# Altium PCB GY-G11.PCBDOC (part 6 of 7)
Units mm, origin at the board's own origin, x right, y up, seen from the top; angles counter-clockwise.
Board outline 170.4 x 114.15 mm, 2 copper layers (Top Layer, Bottom Layer); 364 components, 260 nets, 1285 pads, 753 vias.
Unrouted connection lines stored in the file: 2.
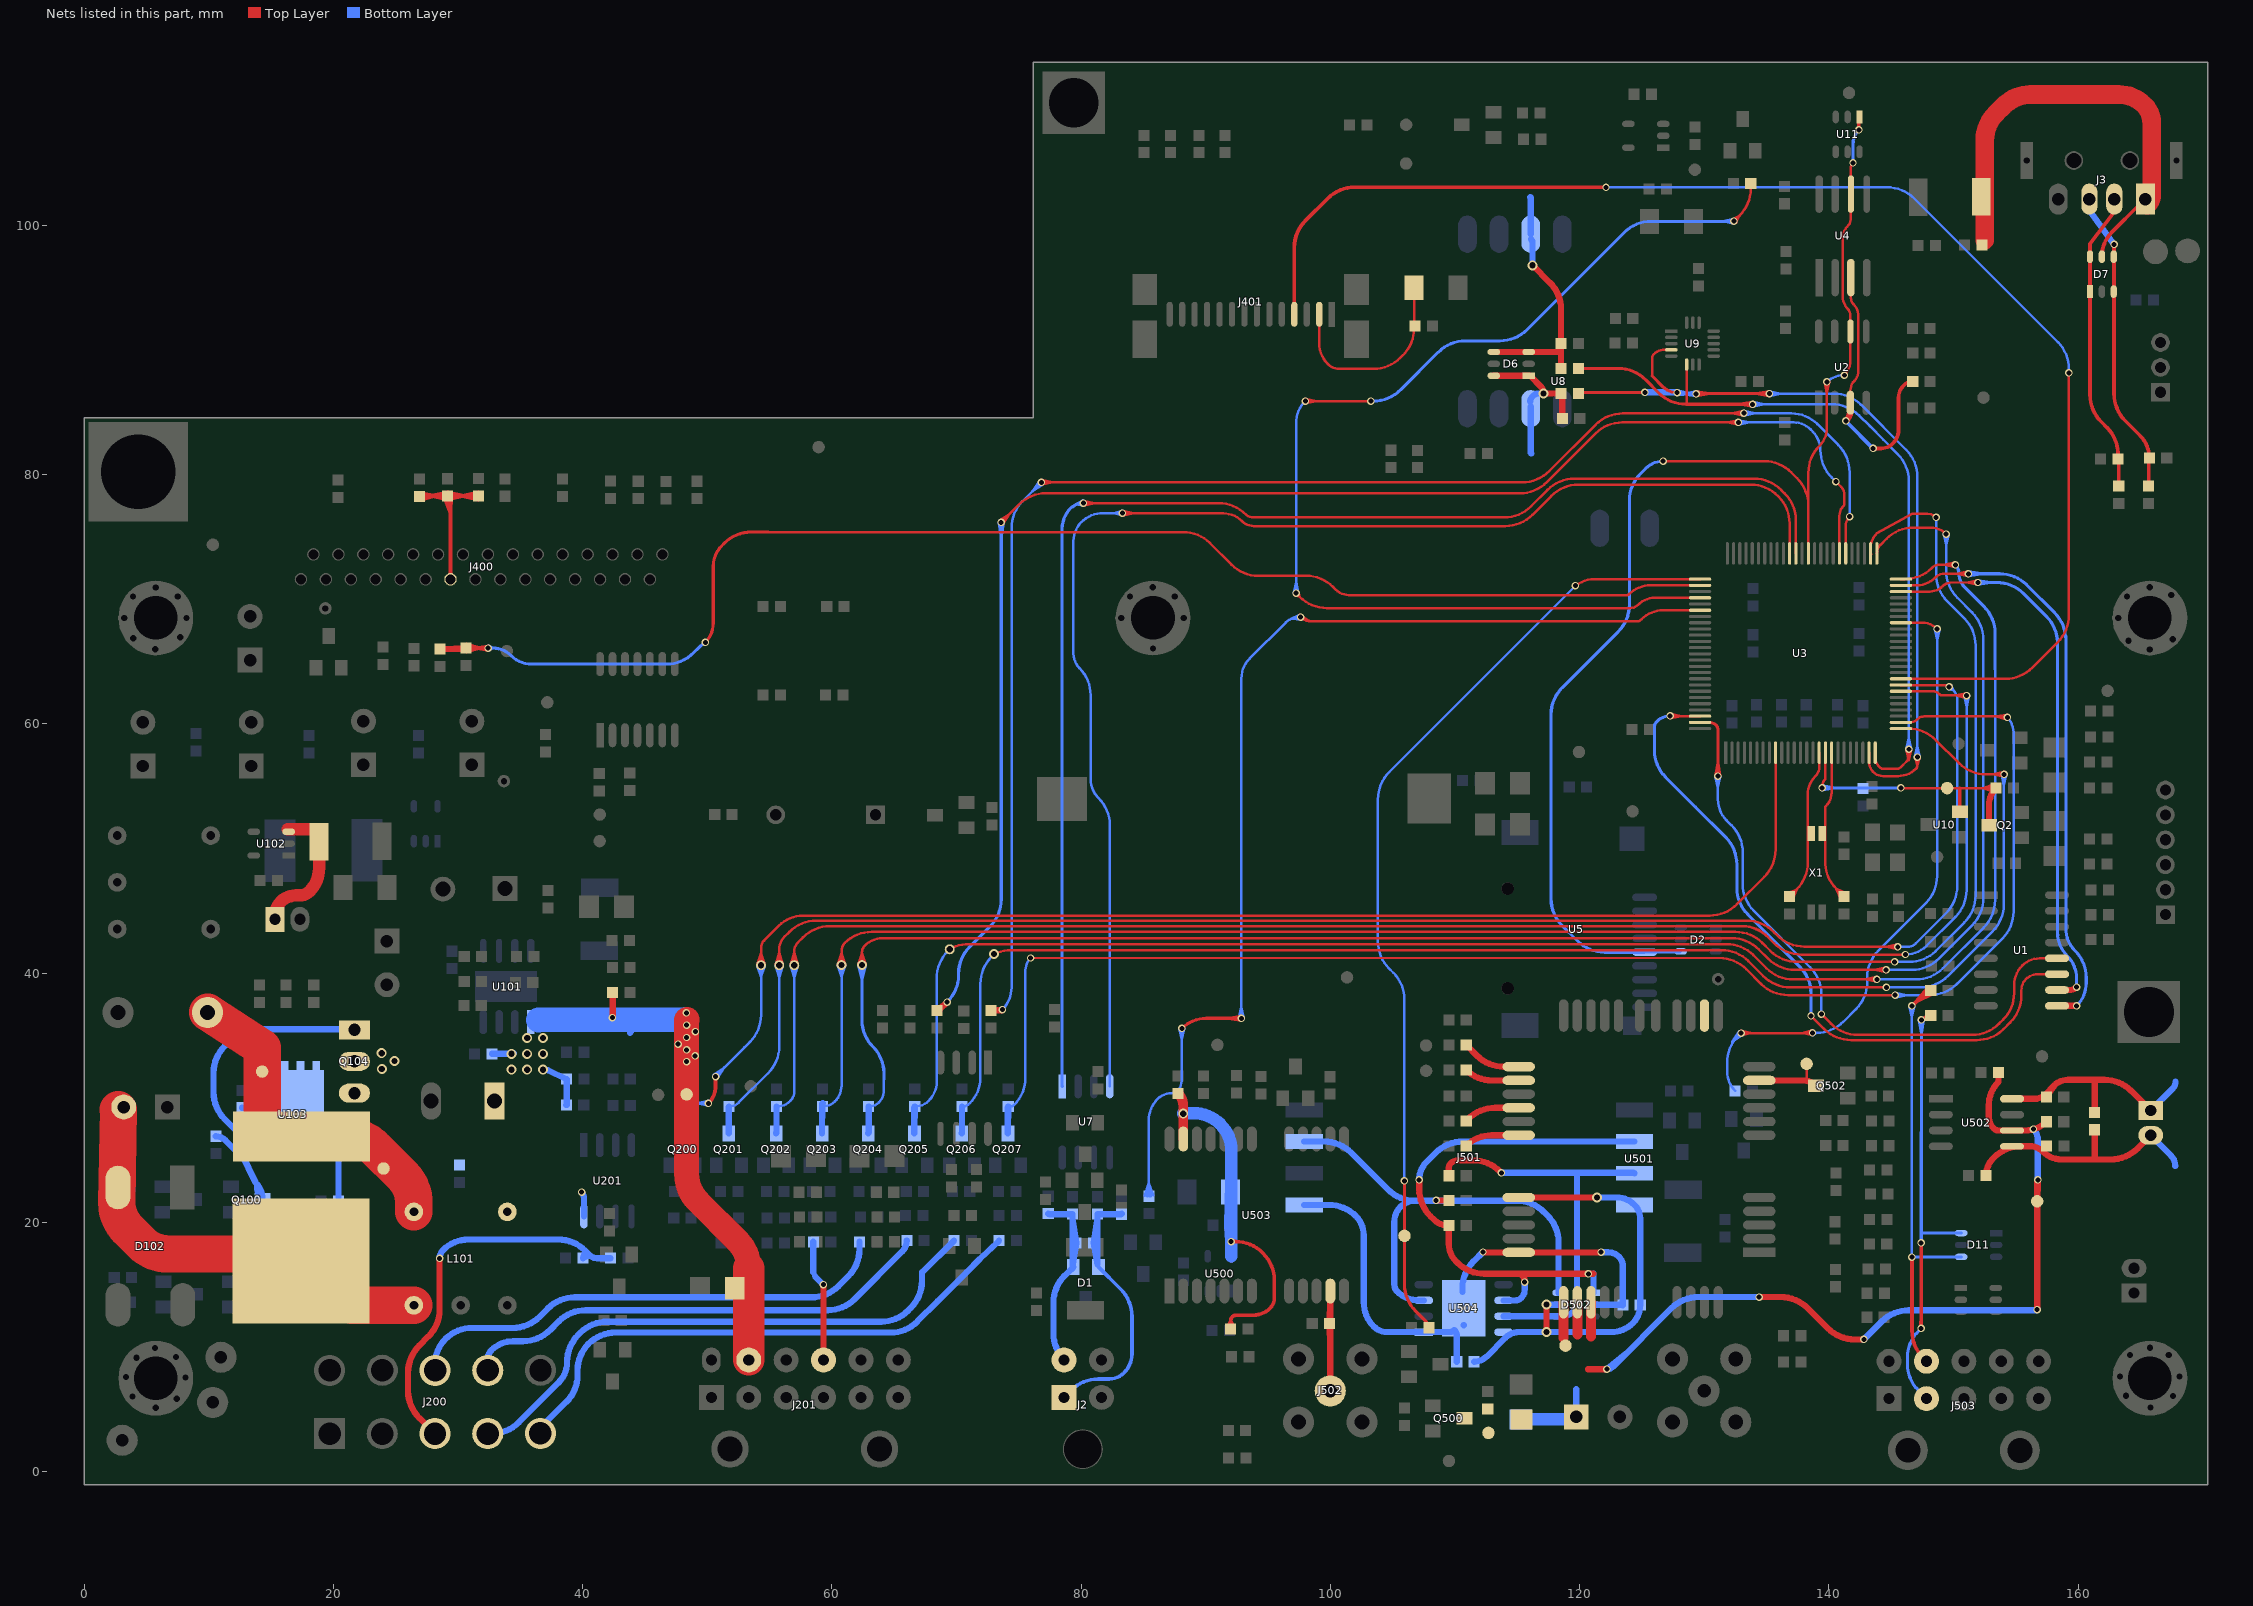
[diagram p6: the nets of this part, all layers, seen from the top]

## Via types
v1: diameter 0.6, hole 0.4, Top Layer to Bottom Layer, 620 vias
v2: diameter 0.8, hole 0.5, Top Layer to Bottom Layer, 121 vias
v3: diameter 1, hole 0.5, Top Layer to Bottom Layer, 10 vias
v4: diameter 1.27, hole 0.711, Top Layer to Bottom Layer, 2 vias

## Nets (pads, with @x,y where several pads share a name; then routed paths per layer and width w, separated by ;. In a path a pad name is that pad's centre, name@x,y a point inside that pad or via, vN(x,y) a via of type N, cw(c..) or ccw(c..) an arc to the next point about the centre after c; other vN are vias at no path point) (continued)
PWREN: Q100.3 R103.1 R110.2 R111.2 R117.2 | length 16.2
  Bottom Layer w0.5: R117.2@10.564,26.919 cw(c10.564,25.863) 11.31,26.61 12.213,25.707 ccw(c12.625,26.12) R110.2@12.625,25.537 ; R110.2@12.472,25.473 cw(c12.625,25.32) R110.2@12.625,25.537 ; 13.865,22.906 ccw(c15.377,22.906) Q100.3@14.308,21.838 ; R103.1@18.995,17.506 18.515,17.985 ccw(c16.347,15.817) 16.347,18.883 R111.2@14.253,18.883 ccw(c14.119,19.017) 14.308,19.017 Q100.3@14.308,21.838 ; R110.2@12.625,25.537 13.74,23.209 cw(c12.369,21.838) Q100.3@14.308,21.838
PWREN1: Q104.1 R110.1 U103.4 | length 21.4
  Bottom Layer w0.5: U103.4@14.817,26.631 13.356,26.631 cw(c13.356,27.665) 13.146,26.652 cw(c13.356,27.665) R110.1@12.625,26.934 11.278,28.281 cw(c13.446,30.449) 10.38,30.449 10.38,31.99 cw(c13.446,31.99) 11.278,34.158 11.722,34.602 cw(c13.89,32.434) 13.89,35.5 21.592,35.5 cw(c21.592,35.363) Q104.1@21.689,35.46
PWREXT: R524.2 U3.43 | length 60.9
  Top Layer w0.2: v1(132.95,35.2) 138.656,35.2 ccw(c138.656,35.234) v1(138.68,35.21) 137.78,35.2 ; v1@132.972,35.001 133.85,35.2 v1@132.972,35.399 ; v1@138.656,35.409 137.78,35.2 ; v1@138.66,35.011 137.78,35.2 ; U3.43@145.776,68.124 147.464,68.124 cw(c147.464,66.404) v1(148.68,67.62)
  Bottom Layer w0.2: R524.2@132.477,30.564 cw(c134.062,32.149) 131.82,32.149 131.82,32.8 cw(c134.886,32.8) 132.718,34.968 v1(132.95,35.2) 132.226,34.476 ; v1@132.795,35.327 132.226,34.476 ; v1@133.077,35.045 132.226,34.476 ; v1(138.68,35.21) 138.99,35.21 ; v1@138.745,35.021 138.99,35.21 ; v1@138.745,35.399 138.99,35.21 ; v1@148.481,67.598 148.68,66.72 v1@148.879,67.598 ; v1(148.68,67.62) 148.68,47.8 cw(c145.614,47.8) 147.782,45.632 143.968,41.818 ccw(c146.136,39.65) 143.07,39.65 143.07,39.29 cw(c140.004,39.29) 142.172,37.122 141.158,36.108 cw(c138.99,38.276) 138.99,35.21
PWRGPS: R512.2 U3.81 | length 101.1
  Top Layer w0.2: v1(88.07,35.57) v1@88.102,35.602 ; v1@97.55,68.78 98.28,68.27 ; v1(97.61,68.57) ccw(c98.431,69.391) 98.431,68.23 124.545,68.23 ccw(c124.545,68.845) 124.98,68.41 cw(c126.703,66.687) 126.703,69.124 U3.81@129.656,69.124
  Top Layer w0.254: v1(88.07,35.57) cw(c90.026,33.614) 90.026,36.38 v1(92.85,36.38) v1@92.828,36.358 ; v1@92.836,36.208 91.788,36.38 v1@92.836,36.552
  Bottom Layer w0.2: R512.2@85.113,22.149 85.42,23.149 ; R512.2@85.31,22.108 85.42,23.149 ; R512.2@85.598,22.118 85.42,23.149 ; R512.2@85.792,22.171 85.42,23.149 ; v1@87.871,35.55 88.06,34.67 ; v1@88.269,35.546 88.06,34.67 ; v1@92.651,36.402 92.85,37.28 v1@93.049,36.402 ; v1(92.85,36.38) 92.85,63.65 cw(c95.095,63.65) 93.508,65.238 96.42,68.15 cw(c97.434,67.136) 97.434,68.57 v1(97.61,68.57) ; v1@97.55,68.78 96.86,68.45 v1@97.638,68.371 ; 85.42,23.149 R512.2@85.454,22.103 cw(c85.536,22.185) 85.42,22.185 85.42,28.196 cw(c87.844,28.196) 86.13,29.91 cw(c87.265,28.775) 87.265,30.38 ccw(c87.265,31.045) 87.735,30.575 ccw(c86.949,31.36) 88.06,31.36 88.06,35.546 cw(c88.094,35.546) v1(88.07,35.57) 88.06,34.67
PWRKEY: pad.8@138.21,32.73 Q502.3 U501.10 | length 6
  Top Layer w0.2: 138.21,31.37 pad.8@138.21,32.73
  Top Layer w0.5: U501.10@134.41,31.398 137.948,31.398 cw(c137.948,30) 138.21,31.373 cw(c137.948,30) Q502.3@138.936,30.988
PWRLCM: R405.2 U3.79 | length 100.3
  Top Layer w0.2: v1@97.136,70.329 97.542,70.198 ; v1(97.24,70.5) 97.542,70.198 ; v1@97.411,70.604 97.542,70.198 ; v1(97.98,85.91) v1(103.251,85.91) ; v1@98.002,85.711 98.88,85.91 v1@98.002,86.109 ; U3.79@129.656,70.124 126.041,70.124 ccw(c126.041,68.199) 124.68,69.56 cw(c124.052,70.188) 124.052,69.3 99.71,69.3 cw(c99.71,72.366) 97.542,70.198 ; v1@132.263,100.502 132.825,100.785 ; v1(132.38,100.34) 132.825,100.785 ; v1@132.542,100.223 132.825,100.785 ; R405.2@133.723,103.358 133.723,102.953 cw(c130.657,102.953) 132.825,100.785
  Bottom Layer w0.2: v1@97.041,70.522 97.24,71.4 v1@97.439,70.522 ; v1(97.24,70.5) 97.24,84.123 cw(c99.767,84.123) v1(97.98,85.91) ; v1@132.356,100.539 131.48,100.33 ; v1@132.356,100.33 ccw(c132.356,100.364) v1(132.38,100.34) 131.48,100.33 ; v1@132.36,100.141 131.48,100.33
  Bottom Layer w0.254: v1(103.251,85.91) 103.46,85.91 ccw(c103.46,88.976) 105.628,86.808 108.663,89.842 cw(c110.831,87.674) 110.831,90.74 113.601,90.74 ccw(c113.601,93.806) 115.769,91.638 123.562,99.432 cw(c125.73,97.264) 125.73,100.33 v1@132.356,100.33
PWRMOBILE: pad.7@105.94,18.93 R511.2 U3.76 | length 77.6
  Top Layer w0.2: v1@119.51,70.93 cw(c121.185,69.255) 121.185,71.624 U3.76@129.656,71.624
  Top Layer w0.254: v1(105.94,23.34) 105.94,15.05 ccw(c109.006,15.05) 106.838,12.882 107.717,12.003 cw(c107.268,11.554) R511.2@107.903,11.554
  Bottom Layer w0.2: v1(105.94,23.34) 105.94,37.87 ccw(c102.874,37.87) 105.042,40.038 104.708,40.372 cw(c106.876,42.54) 103.81,42.54 103.81,53.96 cw(c106.876,53.96) 104.708,56.128 119.51,70.93 cw(c119.534,70.93) 119.517,70.947 v1(119.66,71.09)
PWRPRINT: R401.2 R406.2 U3.77 | length 119.3
  Top Layer w0.2: 54.86,75.42 ccw(c54.908,75.468) 54.908,75.4 88.17,75.4 cw(c88.17,72.334) 90.338,74.502 92.052,72.788 ccw(c94.22,74.956) 94.22,71.89 98.04,71.89 cw(c98.04,68.824) 100.201,70.999 cw(c98.04,68.824) 100.208,70.992 100.42,70.78 ccw(c101.482,71.842) 101.482,70.34 123.791,70.34 ccw(c123.791,70.579) 123.96,70.41 cw(c125.683,68.687) 125.683,71.124 U3.77@129.656,71.124
  Top Layer w0.254: R406.2@30.646,66.103 v1@32.379,66.103 ; R406.2@30.688,65.788 31.852,66.103 R406.2@30.688,66.418 ; v1@32.394,65.918 31.348,66.103 ; v1@32.398,66.263 31.348,66.103 ; v1(32.41,66.09) 31.348,66.103 ; v1(49.84,66.54) ccw(c48.295,68.085) 50.48,68.085 50.48,72.687 cw(c52.733,72.687) 51.14,74.28 51.362,74.502 cw(c53.53,72.334) 53.53,75.4 54.908,75.4
  Top Layer w0.5: R401.2@28.542,66.023 30.453,66.023 ccw(c30.453,66.296) R406.2@30.646,66.103 R401.2@28.694,66.023
  Bottom Layer w0.254: v1(32.41,66.09) 32.787,66.09 ; v1@32.45,65.922 32.787,66.09 ; v1@32.45,66.258 32.787,66.09 ; v1@49.841,66.538 ccw(c51.28,64.164) 49.317,66.127 48.888,65.698 cw(c46.72,67.866) 46.72,64.8 35.902,64.8 cw(c35.902,67.122) 34.26,65.48 ccw(c32.787,64.007) 32.787,66.09
RD1: R235.2 U3.57 | length 131.6
  Top Layer w0.2: v1@73.443,76.325 74.294,76.894 v1@73.725,76.043 ; v1(73.57,76.17) 75.012,77.612 cw(c77.18,75.444) 77.18,78.51 115.2,78.51 ccw(c115.2,81.576) 117.368,79.408 121.262,83.302 cw(c123.43,81.134) 123.43,84.2 v1@132.74,84.2 ; v1@132.716,83.991 131.84,84.2 ; v1@132.72,84.389 131.84,84.2 ; v1(132.74,84.19) 131.84,84.2 ; v1(140.56,79.448) 140.985,79.023 cw(c140.371,78.408) 141.24,78.408 ccw(c141.264,78.384) 141.234,78.4 ccw(c141.264,78.384) 141.23,78.384 141.23,77.633 cw(c141.025,77.633) 141.17,77.488 ccw(c141.953,76.706) 140.846,76.706 U3.57@140.846,73.684
  Top Layer w0.5: R235.2@68.446,37.003 ccw(c68.446,37.31) 68.663,37.093 v1(69.24,37.67) R235.2@68.446,37.003
  Bottom Layer w0.2: v1@132.76,84.389 133.64,84.2 ; v1@132.764,83.991 133.64,84.2 ; v1@140.556,79.444 140.226,79.774 cw(c142.437,81.985) 139.31,81.985 ccw(c137.223,81.985) 138.699,83.461 138.526,83.634 ccw(c137.16,82.269) 137.16,84.2 132.764,84.2 ccw(c132.764,84.166) v1(132.74,84.19) 133.64,84.2
  Bottom Layer w0.254: v1(69.24,37.67) 69.262,37.692 ccw(c67.094,39.86) 70.16,39.86 70.16,39.96 cw(c73.226,39.96) 71.058,42.128 72.692,43.762 ccw(c70.524,45.93) 73.59,45.93 v1@73.59,76.17 ; v1@73.398,76.153 73.59,75.107 ; v1(73.57,76.17) 73.59,75.107 ; v1@73.743,76.159 73.59,75.107
RESET: C33.1 pad.0@149.49,54.854 Q2.3 R15.1 U3.17 U10.2 | length 28.2
  Top Layer w0.2: v1(139.45,54.87) 139.45,54.942 cw(c140.357,54.942) 139.716,55.584 U3.17@139.716,57.694 ; v1(145.77,54.87) ccw(c145.808,54.908) 145.808,54.854 R15.1@153.406,54.854 ; R15.1@153.349,54.514 152.361,54.854 ; R15.1@153.349,55.194 152.361,54.854 ; R15.1@153.396,54.71 152.361,54.854 ; R15.1@153.396,54.998 152.361,54.854
  Top Layer w0.3: U10.2@150.503,52.947 150.503,54.843
  Top Layer w0.5: Q2.3@152.836,51.888 152.836,53.478 cw(c154.782,53.478) R15.1@153.406,54.854
  Bottom Layer w0.254: v1(139.45,54.87) v1(145.77,54.87) ; v1@139.464,54.698 140.512,54.87 v1@139.464,55.042
RF_IN: J502.1 L505.1 U503.11 | length 12.4
  Top Layer w0.5: J502.1@99.987,5.988 ccw(c99.98,5.995) 99.99,5.995 U503.11@99.99,14.494 ; 99.99,9.944 L505.1@99.934,11.892 U503.11@99.99,13.839
RINGM: R516.1 U501.26 | length 4.4
  Top Layer w0.5: R516.1@110.894,26.146 cw(c112.95,24.09) 112.95,26.998 U501.26@115.11,26.998
RS232R: D11.6 J503.3 L4.1 | length 39.7
  Top Layer w0.2: v1(147.42,36.26) 147.487,36.327 cw(c148.166,35.647) L4.1@148.166,36.608 cw(c147.988,36.43) L4.1@148.24,36.43
  Top Layer w0.3: v1(147.4,18.36) cw(c147.376,18.336) 147.41,18.336 147.41,11.548 cw(c147.342,11.548) v1(147.39,11.5) 147.41,12.701
  Bottom Layer w0.254: v1@147.248,36.246 147.42,35.198 v1@147.592,36.246 ; v1(147.39,11.5) 147.188,11.298 ccw(c149.356,9.13) 146.29,9.13 146.29,8.671 ccw(c149.356,8.671) 147.188,6.503 J503.3@147.827,5.864 cw(c147.907,5.864) 147.85,5.92 J503.3@148.422,6.492 ; v1(147.4,18.36) v1(147.42,36.26) ; 147.42,19.17 ccw(c147.479,19.229) 147.479,19.146 D11.6@150.612,19.146
RS232T: D11.4 J503.4 L2.1 | length 43.5
  Top Layer w0.3: v1(146.66,17.22) 146.66,11.301 ccw(c149.726,11.301) 147.558,9.133 J503.4@147.827,8.864 ; v1(146.66,37.37) 147.709,38.419 ; L2.1@147.964,38.822 146.98,37.69 ; L2.1@147.978,38.834 147.709,38.419 ; L2.1@148.193,38.315 147.709,38.419 ; L2.1@148.323,38.359 146.98,37.69 ; 146.98,37.69 L2.1@148.166,38.608 ; 147.709,38.419 cw(c148.166,37.961) L2.1@148.166,38.608 ; 147.709,38.419 L2.1@148.166,38.608
  Bottom Layer w0.2: v1@146.461,37.35 146.65,36.47 ; v1(146.66,17.22) cw(c146.684,17.244) 146.65,17.244 146.65,37.346 cw(c146.684,37.346) v1(146.66,37.37) 146.65,36.47 ; v1@146.859,37.346 146.65,36.47
  Bottom Layer w0.254: v1(146.66,17.22) cw(c146.71,17.17) 146.71,17.241 D11.4@150.612,17.241
RS485A: D1.2 J2.1 L6.1 R27.1 R29.2 | length 24.8
  Bottom Layer w0.3: J2.1@78.627,5.964 79.205,6.542 cw(c81.373,4.374) 81.373,7.44 82.243,7.44 ccw(c82.243,9.147) 83.45,7.94 ccw(c81.953,9.437) 84.07,9.437 84.07,12.474 ccw(c81.004,12.474) 83.172,14.642 D1.2@81.394,16.421
  Bottom Layer w0.5: L6.1@81.308,20.366 R27.1@80.994,18.354 81.308,16.627 L6.1@81.308,20.666 83.171,20.666 ccw(c83.171,20.772) R29.2@83.246,20.697
RS485B: D1.1 J2.2 L5.1 R27.2 R28.1 | length 20.8
  Bottom Layer w0.5: J2.2@78.81,8.81 78.668,8.952 cw(c80.836,11.12) 77.77,11.12 77.77,13.559 cw(c80.836,13.559) 78.668,15.727 D1.1@79.362,16.421 ; D1.1@79.23,16.23 ccw(c79.041,16.419) 79.302,16.361 ccw(c79.041,16.419) D1.1@79.308,16.419 ; L5.1@79.3,20.666 R28.1@77.354,20.706 ccw(c77.45,20.802) 77.45,20.666 L5.1@79.308,20.666 D1.1@79.308,16.419 ; L5.1@79.308,20.356 R27.2@79.597,18.354 D1.1@79.308,16.419
RSTDISP: C413.1 J401.2 R402.2 | length 16.3
  Top Layer w0.2: J401.2@99.101,92.87 99.101,90.56 ccw(c101.491,90.56) 99.801,88.87 ccw(c100.718,89.788) 100.718,88.49 103.451,88.49 ccw(c103.451,91.556) 105.619,89.388 105.82,89.59 ccw(c103.652,91.758) 106.718,91.758 C413.1@106.718,95.003
RTCX1: C28.2 U3.16 X1.1 | length 15.6
  Top Layer w0.2: C28.2@136.635,46.428 137.402,46.718 ; C28.2@136.73,46.249 137.402,46.718 ; C28.2@136.822,46.139 137.402,46.718 ; C28.2@136.933,46.046 137.402,46.718 ; C28.2@137.112,45.952 137.402,46.718 ; U3.16@139.216,57.694 139.216,56.534 cw(c138.206,56.534) 138.92,55.82 ccw(c140.417,54.323) 138.3,54.323 138.3,48.886 cw(c135.234,48.886) 137.402,46.718
RTCX2: C27.2 U3.18 X1.2 | length 15.8
  Top Layer w0.2: U3.18@140.216,57.694 140.216,54.496 cw(c138.694,54.496) 139.77,53.42 ccw(c139.963,53.227) 139.69,53.227 139.69,48.941 ccw(c142.756,48.941) 139.767,48.259 ccw(c142.756,48.941) 140.588,46.773 ; C27.2@140.937,45.946 140.588,46.773 ; C27.2@141.112,46.045 140.588,46.773 ; C27.2@141.222,46.139 140.588,46.773 ; C27.2@141.316,46.249 140.588,46.773 ; C27.2@141.415,46.425 140.588,46.773
RTSM: R517.1 U501.24 | length 4.5
  Top Layer w0.5: R517.1@110.894,28.146 111.048,28.3 cw(c113.216,26.132) 113.216,29.198 U501.24@115.11,29.198
RXD0: U1.12 U3.99 | length 54.7
  Top Layer w0.2: v1@139.382,36.7 cw(c137.42,34.344) 139.588,36.512 140.152,35.948 ccw(c142.32,38.116) 142.32,35.05 151.489,35.05 ccw(c151.489,38.116) 153.657,35.948 153.984,36.275 ccw(c151.869,38.39) 154.86,38.39 154.86,39.027 cw(c157.113,39.027) 155.52,40.62 cw(c156.895,39.245) 156.895,41.189 U1.12@158.3,41.189
  Top Layer w0.254: U3.99@129.656,60.124 130.402,60.124 cw(c130.402,59.341) 130.955,59.895 cw(c130.631,59.57) 131.09,59.57 v1(131.09,55.81) ; v1@130.918,55.824 131.09,56.872 v1@131.262,55.824
  Bottom Layer w0.2: v1@130.891,55.788 131.09,54.91 v1@131.289,55.788 ; v1(131.09,55.81) 131.09,53.95 ccw(c133.48,53.95) 131.79,52.26 132.182,51.868 cw(c130.014,49.7) 133.08,49.7 133.08,47.16 ccw(c136.146,47.16) 133.978,44.992 138.492,40.478 cw(c136.324,38.31) 139.39,38.31 v1(139.39,36.71) cw(c139.414,36.734) v1@139.38,36.734
RXD2: U3.64 U7.1 | length 113.7
  Top Layer w0.2: v1(80.18,77.72) 91.03,77.72 cw(c91.03,74.654) 93.198,76.822 ccw(c93.806,77.43) 93.806,76.57 113.93,76.57 ccw(c113.93,79.636) 116.098,77.468 117.412,78.782 cw(c119.58,76.614) 119.58,79.68 134,79.68 cw(c134,76.614) 136.168,78.782 136.448,78.502 cw(c134.28,76.334) 137.346,76.334 U3.64@137.346,73.684 ; v1@80.202,77.521 81.08,77.72 v1@80.202,77.919
  Bottom Layer w0.2: v1@80.13,77.93 79.58,77.62 v1@80.162,77.516
  Bottom Layer w0.254: U7.1@78.481,30.923 cw(c78.507,30.949) 78.47,30.949 78.47,75.674 cw(c80.753,75.674) 79.139,77.289 cw(c80.18,76.247) v1(80.18,77.72)
RXD2-1: U1.9 U3.49 | length 52.6
  Top Layer w0.2: U3.49@145.776,71.124 147.06,71.124 ccw(c147.06,73.16) 148.5,71.72 cw(c149.297,70.923) 149.297,72.05 v1(151.18,72.05) 150.28,72.05 ; v1@151.158,71.851 150.28,72.05 ; v1@151.158,72.249 150.28,72.05 ; U1.9@158.3,37.379 cw(c158.373,37.305) U1.9@158.373,37.41
  Top Layer w0.5: U1.9@158.3,37.379 v1(159.878,37.379)
  Bottom Layer w0.254: v1(151.18,72.05) 153.7,72.05 cw(c153.7,68.984) 155.868,71.152 158.112,68.908 cw(c155.944,66.74) 159.01,66.74 159.01,43.584 ccw(c161.509,43.584) 159.742,41.816 cw(c157.574,39.648) 160.64,39.648 160.64,39.219 cw(c158.038,39.219) v1(159.878,37.379) ; v1@151.194,71.878 152.242,72.05 v1@151.194,72.222
RXDM: R519.1 U501.22 | length 4.4
  Top Layer w0.5: R519.1@110.894,32.246 ccw(c112.942,34.294) 112.942,31.398 U501.22@115.11,31.398
SCK: D2.4 U2.6 U3.62 U4.6 U5.5 U11.1 | length 104.9
  Top Layer w0.2: v1(126.69,81.08) 134.81,81.08 cw(c134.81,78.014) 136.978,80.182 137.448,79.712 cw(c135.28,77.544) 138.346,77.544 ; U3.62@138.346,73.684 138.346,80.156 cw(c141.412,80.156) 139.244,82.324 ccw(c137.805,83.763) 139.84,83.763 v1(139.84,87.44) 139.84,86.54 ; v1@139.641,87.418 139.84,86.54 ; v1@140.039,87.418 139.84,86.54 ; v1(141.23,87.98) ccw(c140.045,89.165) 141.721,89.165 141.721,92.805 ccw(c141.035,92.805) 141.52,93.29 cw(c142.51,94.28) 141.11,94.28 141.11,99.045 cw(c142.305,99.045) 141.46,99.89 ccw(c140.731,100.619) 141.762,100.619 141.762,104.624 cw(c142.336,104.624) v1(141.93,105.03) ; U11.1@142.4,108.586 cw(c142.57,108.586) U11.1@142.45,108.706
  Top Layer w0.3: v1(142.4,107.66) U11.1@142.4,108.586
  Bottom Layer w0.2: U5.5@125.213,41.687 127.95,41.687 ccw(c127.95,41.907) D2.4@128.106,41.752 ; v1(139.84,87.44) cw(c141.144,86.136) 141.144,87.98 v1(141.23,87.98)
  Bottom Layer w0.254: U5.5@125.213,41.687 121.993,41.687 cw(c121.993,44.753) 119.825,42.585 118.598,43.812 cw(c120.766,45.98) 117.7,45.98 117.7,60.75 cw(c120.766,60.75) 118.598,62.918 123.092,67.412 ccw(c120.924,69.58) 123.99,69.58 123.99,77.93 cw(c127.056,77.93) 124.888,80.098 125.29,80.5 cw(c126.69,79.1) v1(126.69,81.08) ; v1(141.93,105.03) 141.93,106.525 cw(c143.535,106.525) v1(142.4,107.66)
SCK0: J401.4 U3.34 | length 112.3
  Top Layer w0.2: U3.34@145.776,63.624 154.152,63.624 ccw(c154.152,66.69) 156.32,64.522 158.344,66.545 ccw(c156.133,68.757) 159.26,68.757 v1(159.26,88.178)
  Top Layer w0.3: J401.4@97.101,92.87 97.101,98.221 cw(c100.167,98.221) 97.999,100.389 99.782,102.172 cw(c101.95,100.004) 101.95,103.07 v1@122.086,103.07
  Bottom Layer w0.2: v1(122.11,103.06) 144.678,103.06 cw(c144.678,99.994) 146.846,102.162 158.362,90.646 cw(c156.194,88.478) 159.26,88.478 v1(159.26,88.178)
SCL: R25.2 U3.24 U9.4 | length 82.5
  Top Layer w0.2: 125.81,87.92 125.81,89.346 cw(c126.254,89.346) 125.94,89.66 cw(c126.823,88.777) 126.823,90.026 U9.4@127.45,90.026 ; v1@135.218,86.51 v1(135.22,86.51) ; U3.24@143.216,57.694 143.216,56.957 ccw(c144.357,56.957) 143.55,56.15 ccw(c144.347,56.947) 144.347,55.82 145.541,55.82 ccw(c145.541,57.869) 146.99,56.42 ccw(c146.724,56.686) 147.1,56.686 ; v1@146.902,57.299 147.1,56.686 ; v1@147.298,57.299 147.1,56.686 ; 147.1,56.686 v1(147.1,57.33) 147.1,56.686
  Top Layer w0.254: R25.2@119.904,86.524 cw(c120.087,86.341) 120.087,86.6 v1(125.221,86.6) ; 125.81,87.92 126.659,87.071 ccw(c127.82,88.232) v1(127.82,86.59) ; v1@129.351,86.663 130.403,86.51 ; v1@129.357,86.318 130.403,86.51 ; v1@135.206,86.338 134.158,86.51 ; v1@135.206,86.682 134.158,86.51 ; 130.403,86.51 v1(129.34,86.49) cw(c129.388,86.442) 129.388,86.51 v1(135.22,86.51) 134.158,86.51
  Bottom Layer w0.2: v1(135.22,86.51) 140.385,86.51 cw(c140.385,83.383) 142.578,85.612 cw(c140.385,83.383) 142.596,85.594 146.202,81.988 cw(c144.034,79.82) 147.1,79.82 v1(147.1,57.33) ; v1@135.242,86.311 136.12,86.51 v1@135.242,86.709 ; v1@146.901,57.352 147.1,58.23 v1@147.299,57.352
  Bottom Layer w0.254: v1@127.818,86.417 128.912,86.49 ; v1@127.849,86.76 128.912,86.49 ; v1@129.326,86.318 128.278,86.49 v1@129.326,86.662 ; v1(129.34,86.49) 128.026,86.49 cw(c128.026,86.558) 127.978,86.51 127.953,86.535 ccw(c127.82,86.402) v1(127.82,86.59) 128.912,86.49
  Bottom Layer w0.5: v1@125.221,86.62 127.747,86.62 cw(c127.747,86.517) v1(127.82,86.59)
SCLI: D6.1 D6.6 R9.1 R25.1 U8.3 | length 13.4
  Top Layer w0.5: D6.6@113.106,87.943 D6.1@115.906,87.943 cw(c115.906,87.653) 116.112,87.858 116.853,87.117 cw(c116.255,86.52) v2(117.1,86.52) cw(c117.111,86.509) 117.111,86.524 R25.1@118.507,86.524 cw(c118.265,86.283) 118.607,86.283 R9.1@118.607,84.524
  Bottom Layer w0.5: U8.3@116.03,85.87 cw(c116.561,85.87) 116.186,86.246 116.27,86.33 cw(c116.729,85.871) 116.729,86.52 v2(117.1,86.52) ; U8.3@116.07,85.306 U8.3@116.07,85.475 ; U8.3@116.07,85.298 116.07,81.82 ccw(c116.24,81.82) 116.12,81.7
SDA: R26.2 U3.25 U9.6 | length 70.3
  Top Layer w0.2: 128.56,85.67 ccw(c128.53,85.7) 128.572,85.7 U9.6@128.572,88.842 ; U3.25@143.716,57.694 143.716,57.389 ccw(c144.959,57.389) 144.08,56.51 ccw(c144.37,56.8) 144.37,56.39 145.347,56.39 ccw(c145.347,57.073) 145.83,56.59 146.205,56.965 ccw(c145.71,57.46) 146.41,57.46 v1(146.41,57.97) 146.41,57.07 ; v1@146.211,57.948 146.41,57.07 ; v1@146.609,57.948 146.41,57.07
  Top Layer w0.254: R26.2@119.904,88.524 123.117,88.524 cw(c123.117,85.458) 125.285,87.626 126.363,86.548 ccw(c128.531,88.716) 128.531,85.65 v1(133.88,85.65) 132.818,85.66 ; v1@133.864,85.478 132.818,85.66 ; v1@133.868,85.823 132.818,85.66
  Bottom Layer w0.2: v1@133.9,85.849 134.78,85.66 ; v1@133.904,85.451 134.78,85.66 ; 145.512,81.658 cw(c143.344,79.49) 146.41,79.49 v1(146.41,57.97) ; 145.512,81.658 144.364,82.806 143.278,83.892 142.426,84.744 ccw(c140.215,82.533) 142.408,84.762 ccw(c140.215,82.533) 140.215,85.66 133.904,85.66 ccw(c133.904,85.626) v1(133.88,85.65) 134.78,85.66 ; v1@146.211,57.992 146.41,58.87 v1@146.609,57.992
SDAI: D6.3 D6.4 R8.1 R26.1 U8.6 | length 19.6
  Top Layer w0.5: D6.4@113.106,89.848 118.43,89.848 ccw(c118.43,89.956) 118.507,89.88 ; v2(116.22,96.8) 117.609,95.411 cw(c115.44,93.243) 118.507,93.243 R26.1@118.507,88.524
  Bottom Layer w0.5: 116.04,102.27 cw(c115.967,102.197) 116.07,102.197 U8.6@116.07,99.306 ; U8.6@116.09,98.9 cw(c115.776,98.586) 116.22,98.586 v2(116.22,96.8)
SERLED: U501.13
SIMCLK: D502.1 J501.6 R513.2 U504.6 | length 43.2
  Top Layer w0.5: v1(107.12,23.41) 107.12,22.68 ccw(c110.186,22.68) 108.018,20.512 108.28,20.25 ccw(c109.497,21.467) R513.2@109.497,19.746 109.497,18.259 ccw(c111.419,18.259) 110.06,16.9 110.182,16.778 ccw(c112.35,18.946) 112.35,15.88 121.086,15.88 ; 115.226,15.88 cw(c115.226,15.725) 115.335,15.835 cw(c114.721,15.22) v1(115.59,15.22)
  Bottom Layer w0.5: v1(107.12,23.41) cw(c109.196,23.41) 107.728,24.878 108.441,25.591 cw(c110.609,23.423) 110.609,26.489 J501.6@124.4,26.489 ; U504.6@113.891,13.746 114.841,13.746 ccw(c114.841,14.409) 115.31,13.94 ccw(c114.634,14.616) 115.59,14.616 v1(115.59,15.22) ; D502.1@121.106,14.357 ccw(c121.096,14.366) 121.11,14.366 121.11,15.89
  other v1: 120.69,15.88
SIMDATA: D502.6 J501.3 R514.2 U504.3 | length 39.6
  Top Layer w0.5: v1(108.48,21.77) R514.2@109.497,21.746
  Bottom Layer w0.5: J501.3@97.9,26.489 99.501,26.489 cw(c99.501,23.423) 101.669,25.591 104.622,22.638 ccw(c106.79,24.806) 106.765,21.74 ccw(c106.765,20.135) 105.63,21.27 ccw(c106.861,20.039) 105.12,20.039 105.12,15.025 ccw(c105.905,15.025) 105.35,14.47 ccw(c107.099,16.219) 107.099,13.746 U504.3@107.491,13.746 ; 106.79,21.74 114.96,21.74 cw(c114.96,18.674) 117.128,20.842 117.408,20.562 cw(c115.24,18.394) 118.306,18.394 D502.6@118.306,14.357
SIMGND: C525.2 C526.1 D502.2 J501.1 U501.31 U504.0 U504.1 | length 44
  Top Layer w0.5: v1(112.24,17.63) ccw(c112.318,17.708) 112.318,17.598 121.69,17.598 ccw(c121.69,17.64) v1(121.72,17.61)
  Bottom Layer w0.5: J501.1@97.9,21.409 99.871,21.409 cw(c99.871,18.343) 102.039,20.511 cw(c100.516,18.988) 102.67,18.988 102.67,13.606 ccw(c105.436,13.606) 103.48,11.65 ccw(c104.553,12.723) 104.553,11.206 109.543,11.206 ccw(c109.543,11.767) 109.94,11.37 cw(c109.468,10.898) 110.135,10.898 C526.1@110.135,8.826 ; U504.0@110.59,14.42 110.59,14.71 cw(c113.656,14.71) 111.488,16.878 v1(112.24,17.63) ; U504.0@110.67,11.77 cw(c110.67,11.722) U504.0@110.704,11.756 ; D502.2@121.106,13.404 123.367,13.404 cw(c123.367,13.272) C525.2@123.46,13.365 123.46,16.515 ccw(c122.435,16.515) 123.16,17.24 ccw(c122.267,16.347) 122.267,17.61 v1(121.72,17.61)
SIMRST: D502.4 J501.7 R515.2 U504.7 | length 33.1
  Top Layer w0.5: R515.2@109.497,23.746 109.497,24.381 cw(c110.019,24.381) 109.65,24.75 cw(c110.205,24.195) 110.205,24.98 111.44,24.98 cw(c111.44,21.914) 113.608,24.082 v1(113.71,23.98)
  Bottom Layer w0.5: v1(113.71,23.98) 124.325,23.98 cw(c124.325,23.873) J501.7@124.4,23.949 ; U504.7@113.891,12.476 118.586,12.476 ccw(c118.586,13.754) 119.49,12.85 ccw(c118.766,13.574) 119.79,13.574 119.79,23.956 ccw(c119.756,23.956) 119.78,23.98 ; D502.4@118.248,12.476 cw(c118.248,12.393) D502.4@118.306,12.452
SIMVCC: C525.1 C526.2 D502.5 J501.8 U501.27 U504.8 | length 36.2
  Top Layer w0.5: U501.27@115.11,21.998 121.36,21.998 ccw(c121.36,22.04) v2(121.39,22.01) ; v2(117.33,11.22) v2(117.33,13.42)
  Bottom Layer w0.5: C526.2@111.532,8.826 ccw(c111.532,10.234) 112.528,9.238 114.04,10.75 cw(c115.14,9.65) 115.14,11.206 122.539,11.206 ccw(c122.539,13.636) 124.258,11.918 ccw(c122.81,13.365) C525.1@124.857,13.365 124.857,20.305 ccw(c123.296,20.305) J501.8@124.4,21.409 ccw(c122.949,19.957) 122.949,22.01 v2(121.39,22.01) ; v2(117.33,13.42) ccw(c117.369,13.459) 117.369,13.404 D502.5@118.306,13.404
SPEEDPULS: J200.5 R238.1 R241.2 | length 34.6
  Top Layer w0.5: J200.5@28.148,3.053 26.888,4.313 cw(c29.056,6.481) 25.99,6.481 25.99,7.95 cw(c29.056,7.95) 26.888,10.118 27.622,10.852 ccw(c25.454,13.02) 28.52,13.02 v1(28.52,17.11) 28.52,15.31
  Bottom Layer w0.5: v1(28.52,17.11) cw(c29.486,17.11) 28.803,17.793 cw(c30.824,15.772) 30.824,18.63 38.04,18.63 cw(c38.04,15.564) 40.208,17.732 ; 40.208,17.732 R241.2@40.025,17.135 40.567,17.373 ; 40.208,17.732 40.415,17.525 40.567,17.373 ; 40.567,17.373 ccw(c41.14,17.945) 41.14,17.135 ; 41.14,17.135 R238.1@42.228,17.135 41.14,17.135
SPK1: C515.2 C519.1 LS500.2 R510.2 U502.5 | length 21
  Top Layer w0.5: R510.2@152.603,23.754 cw(c154.58,23.754) 153.182,25.152 153.254,25.224 cw(c155.422,23.056) 155.422,26.122 156.1,26.122 cw(c156.1,24.632) 157.154,25.686 ccw(c158.665,27.197) 158.665,25.06 162.622,25.06 ccw(c162.622,28.126) 164.79,25.958 LS500.2@165.821,26.989 ; C519.1@161.322,27.442 161.322,25.078 ccw(c161.348,25.078) 161.33,25.06
  Bottom Layer w0.5: LS500.2@165.821,26.989 167.45,25.36 cw(c166.63,24.54) 167.79,24.54
SPK2: C514.1 C519.2 LS500.1 U502.8 | length 19.4
  Top Layer w0.5: U502.8@154.692,29.919 156.517,29.919 ccw(c156.517,31.083) 157.34,30.26 158.07,30.99 ; C514.1@157.442,30.078 158.07,30.99 ; 161.28,31.45 cw(c161.178,31.348) 161.322,31.348 C519.2@161.322,28.839 ; LS500.1@165.821,28.989 164.259,30.552 ccw(c162.091,28.384) 162.091,31.45 159.18,31.45 ccw(c159.18,29.881) 158.07,30.99
  Bottom Layer w0.5: LS500.1@165.821,28.989 167.582,30.75 ccw(c167.032,31.3) 167.81,31.3
SW0: pad.0@54.31,40.64 Q200.3 R200.2 U3.9 | length 123.3
  Top Layer w0.2: pad.0@54.013,40.685 54.31,41.64 pad.0@54.607,40.685 ; pad.0@54.31,40.64 54.31,42.041 cw(c55.129,42.041) 54.55,42.62 55.742,43.812 ; U3.9@135.716,57.694 135.716,49.907 cw(c132.65,49.907) 134.818,47.739 132.597,45.518 cw(c130.429,47.686) 130.429,44.62 57.693,44.62 ccw(c57.693,41.861) 55.744,43.814 ; 55.742,43.812 cw(c57.693,41.861) 55.744,43.814 ; 55.742,43.812 cw(c57.91,41.644) 55.744,43.814
  Top Layer w0.254: v1@50.08,29.584 ccw(c50.114,29.584) v1(50.09,29.56)
  Top Layer w0.3: v1(50.09,29.56) ccw(c48.714,30.936) 50.66,30.936 ; 50.66,30.936 v1(50.66,31.7) 50.66,30.936
  Bottom Layer w0.2: R200.2@48.078,29.297 cw(c48.078,30.202) R200.2@48.068,29.297 ; R200.2@48.106,29.297 R200.2@48.046,29.297 ccw(c48.046,31.762) 48.06,29.297 ccw(c48.046,31.762) R200.2@48.068,29.297 ; R200.2@48.404,29.323 cw(c48.046,31.762) 48.078,29.297 cw(c48.046,31.762) R200.2@48.068,29.297 ; v1@50.068,29.361 49.19,29.56 v1@50.068,29.759 ; v1(50.09,29.56) 48.681,29.56 ccw(c48.681,28.662) 48.047,29.298 ccw(c48.078,30.202) R200.2@48.068,29.297 ; v1@50.53,31.852 51.368,32.438 ; v1@50.817,31.576 51.368,32.438 ; pad.0@54.013,40.595 54.31,39.64 pad.0@54.607,40.595 ; pad.0@54.31,40.64 54.31,36.65 cw(c51.244,36.65) 53.414,34.484 cw(c51.244,36.65) 53.412,34.482 52.981,34.051 50.681,31.751 ccw(c50.732,31.7) v1(50.66,31.7) 51.368,32.438
  Bottom Layer w0.5: Q200.3@48.012,27.164 ccw(c47.929,27.247) 48.046,27.247 R200.2@48.046,29.297 Q200.3@48.046,27.353
SW1: pad.0@55.77,40.64 Q201.3 R201.2 U3.33 | length 145.4
  Top Layer w0.2: pad.0@55.473,40.685 55.77,41.64 pad.0@56.067,40.685 ; pad.0@55.77,40.64 55.77,41.888 cw(c57.272,41.888) 56.21,42.95 56.582,43.322 cw(c58.75,41.154) 58.75,44.22 133.399,44.22 cw(c133.399,41.154) 135.567,43.322 135.861,43.028 ccw(c138.029,45.196) 138.029,42.13 v1@145.472,42.13 ; v1@145.493,41.912 144.619,42.13 ; v1@145.502,42.309 144.619,42.13 ; v1(145.52,42.11) 144.619,42.13 ; U3.33@145.776,63.124 149.279,63.124 cw(c149.279,62.599) v1(149.65,62.97)
  Bottom Layer w0.2: pad.0@55.473,40.595 55.77,39.64 pad.0@56.067,40.595 ; pad.0@55.77,40.64 55.77,34.14 cw(c52.704,34.14) 54.872,31.972 52.516,29.616 cw(c51.746,30.386) R201.2@51.756,29.297 ; v1(145.52,42.11) 146.28,42.11 ccw(c146.28,43.1) 146.98,42.4 149.392,44.812 ccw(c147.224,46.98) 150.29,46.98 150.29,61.952 ccw(c149.232,61.952) 150.24,62.273 ccw(c149.232,61.952) 149.98,62.7 ; v1@149.563,62.79 149.98,62.7 ; v1(149.65,62.97) 149.98,62.7 ; v1@149.655,62.978 cw(c149.1,62.044) 149.868,62.812 149.98,62.7 ; v1@149.809,63.091 149.98,62.7 ; R201.2@51.756,29.297 cw(c51.746,30.386) R201.2@51.746,29.297 ccw(c51.746,31.183) R201.2@51.756,29.297
  Bottom Layer w0.5: Q201.3@51.712,27.164 51.712,29.214 cw(c51.829,29.214) R201.2@51.746,29.297 Q201.3@51.712,27.351
SW2: pad.0@56.98,40.64 Q202.3 R202.2 U3.32 | length 148.7
  Top Layer w0.2: pad.0@56.683,40.685 56.98,41.64 pad.0@57.277,40.685 ; pad.0@56.98,40.64 56.98,41.756 cw(c58.004,41.756) 57.28,42.48 57.672,42.872 cw(c59.84,40.704) 59.84,43.77 133.093,43.77 cw(c133.093,41.004) 135.049,42.96 135.611,42.398 ccw(c137.779,44.566) 137.779,41.5 v1(146.14,41.5) ; 132.969,43.77 cw(c132.969,40.704) 135.137,42.872 ; U3.32@145.776,62.624 148.343,62.624 cw(c148.343,61.963) 148.81,62.43 ccw(c149.124,62.744) 149.124,62.3 150.678,62.3 ; v1@150.969,62.083 150.678,62.3 ; v1@151.001,62.466 150.678,62.3 ; v1@151.011,62.072 150.139,62.3 ; v1@151.024,62.469 150.139,62.3 ; v1@151.04,62.15 ccw(c150.678,61.788) 150.678,62.3 ; 150.139,62.3 v1(151.04,62.27) 150.678,62.3
  Bottom Layer w0.2: R202.2@55.546,29.297 55.566,29.297 ccw(c55.566,30.844) 56.66,29.75 ccw(c55.887,30.523) 56.98,30.523 pad.0@56.98,40.64 ; pad.0@56.683,40.595 56.98,39.64 pad.0@57.277,40.595 ; v1(146.14,41.5) ccw(c146.14,43.89) 147.83,42.2 150.142,44.512 ccw(c147.974,46.68) 151.04,46.68 v1(151.04,62.27) ; v1@150.841,62.248 151.04,61.37 v1@151.239,62.248
  Bottom Layer w0.5: Q202.3@55.512,27.164 ccw(c55.429,27.247) 55.546,27.247 R202.2@55.546,29.297 Q202.3@55.546,27.353
SW3: pad.0@60.77,40.65 Q203.3 R203.2 U3.52 | length 155.3
  Top Layer w0.2: pad.0@60.473,40.695 60.77,41.65 pad.0@61.067,40.695 ; pad.0@60.77,40.65 60.77,41.802 cw(c61.658,41.802) 61.03,42.43 cw(c63.179,40.281) 63.179,43.32 132.499,43.32 cw(c132.499,40.254) 134.667,42.422 135.291,41.798 ccw(c137.459,43.966) 137.459,40.9 v1(145.27,40.9) ; U3.52@143.38,73.601 ccw(c143.263,73.601) U3.52@143.346,73.684 143.346,74.103 cw(c145.04,74.103) 143.842,75.3 146.67,76.858 147.9,76.858 cw(c147.9,75.868) v1@148.599,76.569
  Bottom Layer w0.2: R203.2@59.246,29.297 ccw(c59.246,30.7) 60.238,29.708 ccw(c58.953,30.992) 60.77,30.992 pad.0@60.77,40.65 ; pad.0@60.473,40.605 60.77,39.65 pad.0@61.067,40.605 ; v1(145.27,40.9) 146.42,40.9 ccw(c146.42,43.966) 148.588,41.798 150.872,44.082 ccw(c148.704,46.25) 151.77,46.25 151.77,66.3 ccw(c148.704,66.3) 150.872,68.468 149.488,69.852 cw(c151.656,72.02) 148.59,72.02 148.59,76.544 cw(c148.624,76.544) v1(148.6,76.568)
  Bottom Layer w0.5: Q203.3@59.212,27.164 59.212,29.443 cw(c59.377,29.443) R203.2@59.26,29.56 ; Q203.3@59.212,27.352 R203.2@59.246,29.297
SW4: pad.0@62.41,40.65 Q204.3 R205.2 U3.51 | length 158.5
  Top Layer w0.2: pad.0@62.113,40.695 62.41,41.65 pad.0@62.707,40.695 ; pad.0@62.41,40.65 62.41,41.665 cw(c63.195,41.665) 62.64,42.22 cw(c64.064,40.796) 64.064,42.81 132.199,42.81 cw(c132.199,39.744) 134.367,41.912 135.111,41.168 ccw(c137.279,43.336) 137.279,40.27 v1(144.59,40.27) 143.69,40.27 ; U3.51@143.846,73.684 cw(c144.813,73.684) 144.129,74.368 144.622,74.86 cw(c146.79,72.692) 146.79,75.758 148.158,75.758 cw(c148.158,73.988) v1@149.373,75.276 ; v1@144.568,40.071 143.69,40.27 ; v1@144.568,40.469 143.69,40.27 ; v1@149.395,75.105 ccw(c147.659,74.969) v1@149.373,75.276 ; v1@149.373,75.276 cw(c148.158,73.988) v1@149.409,75.241 ; v1@149.373,75.277 cw(c147.503,73.333) v1@149.409,75.241 ; v1@149.409,75.241 cw(c148.158,73.988) v1(149.41,75.24) ccw(c147.503,73.333) v1@149.409,75.241
  Bottom Layer w0.2: R205.2@62.946,29.297 ccw(c62.946,30.458) 63.767,29.637 ccw(c62.795,30.61) 64.17,30.61 64.17,31.48 ; v1(144.59,40.27) 146.65,40.27 ccw(c146.65,43.336) 148.818,41.168 151.482,43.832 ccw(c149.314,46) 152.38,46 152.38,66.78 ccw(c149.314,66.78) 151.482,68.948 150.298,70.132 cw(c152.466,72.3) 149.4,72.3 149.4,75.216 cw(c149.434,75.216) v1(149.41,75.24) 149.4,74.34 ; v1@149.211,75.22 149.4,74.34 ; v1@149.609,75.216 149.4,74.34
  Bottom Layer w0.254: pad.0@62.139,40.618 62.41,39.488 pad.0@62.681,40.618 ; pad.0@62.41,40.65 62.41,36.24 ccw(c65.476,36.24) 63.308,34.072 cw(c61.227,31.991) 64.17,31.991 64.17,31.48
  Bottom Layer w0.5: Q204.3@62.912,27.164 ccw(c62.829,27.247) 62.946,27.247 R205.2@62.946,29.297 Q204.3@62.946,27.353
SW5: pad.0@69.45,41.92 Q205.3 R207.2 U3.50 | length 142.2
  Top Layer w0.2: pad.0@69.448,41.924 cw(c70.99,39.274) 70.99,42.34 131.769,42.34 cw(c131.769,39.274) 133.937,41.442 134.981,40.398 ccw(c137.149,42.566) 137.149,39.5 v1(143.84,39.5) ; v1@143.818,39.301 142.94,39.5 v1@143.818,39.699 ; U3.50@145.776,71.624 146.094,71.624 ccw(c146.094,74.69) 148.262,72.522 cw(c148.861,71.922) 148.861,72.77 v1(150.15,72.77) ; v1@150.128,72.571 149.25,72.77 v1@150.128,72.969
  Bottom Layer w0.2: R207.2@66.646,29.297 ccw(c66.646,30.869) 67.757,29.757 ccw(c66.182,31.333) 68.41,31.333 68.41,39.61 cw(c71.476,39.61) 69.308,41.778 pad.0@69.45,41.92 ; v1(143.84,39.5) 146.98,39.5 ccw(c146.98,42.566) 149.148,40.398 152.432,43.682 ccw(c150.264,45.85) 153.33,45.85 153.33,64.36
  Bottom Layer w0.254: v1(150.15,72.77) cw(c149.498,72.118) 150.42,72.118 ccw(c152.033,72.118) 150.892,70.978 152.432,69.438 cw(c150.264,67.27) 153.33,67.27 153.33,64.36
  Bottom Layer w0.5: Q205.3@66.612,27.164 66.612,29.214 cw(c66.729,29.214) R207.2@66.646,29.297 Q205.3@66.612,27.351
SW6: pad.0@73,41.54 Q206.3 R208.2 U3.26 | length 127
  Top Layer w0.2: pad.0@73.005,41.53 cw(c74.39,38.794) 74.39,41.86 131.369,41.86 cw(c131.369,38.794) 133.537,40.962 134.731,39.768 ccw(c136.899,41.936) 136.899,38.87 v1(144.61,38.87) ; U3.26@145.776,59.624 146.396,59.624 cw(c146.396,56.558) 148.564,58.726 150.432,56.858 ccw(c152.6,59.026) 152.6,55.96 v1(154.05,55.96) ; v1@154.028,55.761 153.15,55.96 v1@154.028,56.159
  Bottom Layer w0.2: R208.2@70.446,29.297 ccw(c70.446,30.145) 71.045,29.545 ccw(c68.958,31.633) 71.91,31.633 71.91,39.15 cw(c74.976,39.15) 72.808,41.318 72.979,41.489 ccw(c72.928,41.54) pad.0@73,41.54 ; v1(144.61,38.87) 147.37,38.87 ccw(c147.37,41.936) 149.538,39.768 153.132,43.362 ccw(c150.964,45.53) 154.03,45.53 v1@154.03,55.912 ; v1@153.851,55.942 154.03,55.059 ; v1(154.05,55.96) 154.03,55.059 ; v1@154.248,55.933 154.03,55.059
  Bottom Layer w0.5: Q206.3@70.412,27.164 ccw(c70.329,27.247) 70.446,27.247 R208.2@70.446,29.297 Q206.3@70.446,27.353
SW7: Q207.3 R209.2 U3.27 | length 128.8
  Top Layer w0.2: v1(75.94,41.22) 131.199,41.22 cw(c131.199,38.154) 133.367,40.322 134.551,39.138 ccw(c136.719,41.306) 136.719,38.24 v1(145.31,38.24) ; U3.27@145.776,60.124 146.481,60.124 ccw(c146.481,60.999) 147.1,60.38 cw(c147.631,59.849) 147.631,60.6 154.117,60.6 cw(c154.117,60.327) v1(154.31,60.52) 153.385,60.6 ; v1@154.271,60.324 153.385,60.6 ; v1@154.306,60.72 153.385,60.6
  Bottom Layer w0.2: R209.2@74.146,29.297 74.258,29.297 ccw(c74.258,29.826) 74.475,29.344 ccw(c74.258,29.826) 74.632,29.452 ccw(c72.464,31.62) 75.53,31.62 75.53,40.23 cw(c76.93,40.23) v1(75.94,41.22) ; v1(145.31,38.24) 148.1,38.24 ccw(c148.1,41.306) 150.268,39.138 153.912,42.782 ccw(c151.744,44.95) 154.81,44.95 154.81,59.313 ccw(c153.103,59.313) v1(154.31,60.52) ; v1@145.332,38.041 146.21,38.24 v1@145.332,38.439
  Bottom Layer w0.5: Q207.3@74.112,27.164 74.112,29.214 cw(c74.229,29.214) R209.2@74.146,29.297 Q207.3@74.112,27.351
SW-IN3: J201.8 R218.1 | length 9.8
  Top Layer w0.5: v1(59.32,15.01) cw(c59.303,14.993) 59.327,14.993 J201.8@59.327,8.964
  Bottom Layer w0.3: 58.506,16 ccw(c58.931,16) 58.63,15.7
  Bottom Layer w0.5: 58.506,16 R218.1@58.506,18.446 ; 58.63,15.7 v1(59.32,15.01)
SW-IN4: J200.6 R219.1 | length 39.6
  Bottom Layer w0.5: J200.6@28.153,8.133 28.153,8.64 cw(c30.984,8.64) 28.982,10.642 cw(c31.15,8.474) 31.15,11.54 34.38,11.54 ccw(c34.38,14.606) 36.548,12.438 37.202,13.092 cw(c39.37,10.924) 39.37,13.99 58.35,13.99 ccw(c58.35,17.056) 60.518,14.888 61.308,15.678 ccw(c59.14,17.846) 62.206,17.846 R219.1@62.206,18.446
SW-IN5: J200.8 R220.1 | length 38.4
  Bottom Layer w0.5: J200.8@32.383,8.128 32.383,9.046 cw(c33.364,9.046) 32.67,9.74 cw(c34.432,7.978) 34.432,10.47 35.21,10.47 ccw(c35.21,13.536) 37.378,11.368 38.072,12.062 cw(c40.24,9.894) 40.24,12.96 59.66,12.96 ccw(c59.66,16.026) 61.828,13.858 65.645,17.675 ccw(c64.775,18.546) R220.1@66.006,18.546
SW-IN6: J200.7 R221.2 | length 45.6
  Bottom Layer w0.5: J200.7@32.378,3.062 32.712,3.062 ccw(c32.712,6.128) 34.88,3.96 38.05,7.13 ccw(c36.36,8.82) 38.75,8.82 cw(c41.816,8.82) 39.648,10.988 39.802,11.142 cw(c41.97,8.974) 41.97,12.04 63.95,12.04 ccw(c63.95,15.106) 66.118,12.938 66.323,13.143 ccw(c64.155,15.311) 67.221,15.311 67.221,15.978 ; 67.221,16 67.221,15.978 ; R221.2@69.797,18.554 67.221,15.978
SW-IN7: J200.9 R222.1 | length 46.9
  Bottom Layer w0.5: J200.9@36.608,3.098 J200.9@36.608,3.072 ; 71.81,17.01 71.881,17.078 ; J200.9@36.608,3.072 cw(c37.684,3.072) 36.923,3.833 38.692,5.602 ccw(c36.524,7.77) 39.59,7.77 39.59,8.133 cw(c42.601,8.133) 40.472,10.262 cw(c42.64,8.094) 42.64,11.16 64.693,11.16 ccw(c64.693,14.226) 66.861,12.058 68.481,13.678 70.818,16.015 71.881,17.078 ; J200.9@36.608,3.072 cw(c36.67,3.072) 36.626,3.116 ccw(c36.67,3.072) J200.9@36.608,3.072 ; 71.881,17.078 R222.1@73.406,18.546 71.881,17.078
TD1: R234.2 U3.56 | length 130.4
  Top Layer w0.2: v1(76.81,79.39) 115.39,79.39 ccw(c115.39,82.456) 117.558,80.288 121.292,84.022 cw(c123.46,81.854) 123.46,84.92 133.17,84.92 v1(133.17,84.94) 132.269,84.92 ; v1@76.832,79.191 77.71,79.39 v1@76.832,79.589 ; v1@133.143,85.138 132.269,84.92 ; v1@133.152,84.741 132.269,84.92 ; U3.56@141.346,73.684 141.346,75.87 cw(c142.418,75.87) v1(141.66,76.628)
  Top Layer w0.5: R234.2@72.746,37.003 v1(73.67,37.07) cw(c73.508,37.232) 73.508,37.003 R234.2@72.746,37.003
  Bottom Layer w0.2: v1(73.67,37.07) ccw(c71.883,38.857) 74.41,38.857 74.41,75.72 cw(c77.476,75.72) 75.308,77.888 v1(76.81,79.39) ; v1@76.655,79.517 76.086,78.666 v1@76.937,79.235 ; v1@133.188,84.741 134.071,84.92 ; v1@133.197,85.138 134.071,84.92 ; v1(141.66,76.628) 141.66,80.2 ccw(c138.594,80.2) 140.762,82.368 139.073,84.057 ccw(c136.99,81.975) 136.99,84.92 133.218,84.92 cw(c133.218,84.988) v1(133.17,84.94) 134.071,84.92
TH: J400.18 R407.2 R408.2 R411.1 | length 32.5
  Top Layer w0.3: R411.1@26.917,78.559 28.237,78.297 ; R411.1@26.931,77.974 28.237,78.297 ; R407.2@28.875,78.197 29.4,76.879 ; R407.2@28.92,78.104 29.4,77.694 ; R407.2@29.122,77.985 27.814,78.297 ; R407.2@29.131,78.57 27.814,78.297 ; R407.2@29.186,78.57 30.503,78.297 ; R407.2@29.195,77.985 30.503,78.297 ; J400.18@29.4,71.6 29.4,77.694 ; R407.2@29.449,78.323 29.4,77.694 ; R407.2@29.452,78.297 29.4,76.879 ; R408.2@31.622,78.004 30.31,78.297 R408.2@31.622,78.59 ; R408.2@31.654,78.297 26.967,78.297 ccw(c26.967,78.191) R411.1@26.892,78.266 28.237,78.297 ; 27.814,78.297 R407.2@29.158,78.277 ; R407.2@29.158,78.277 cw(c28.575,77.694) 29.4,77.694 ; R407.2@29.158,78.277 30.503,78.297 ; R407.2@29.158,78.277 29.4,76.879 ; R407.2@29.158,78.277 29.4,77.694
TXD0: U1.11 U3.98 | length 58.2
  Top Layer w0.2: v1@127.279,60.441 128.16,60.624 ; v1@127.286,60.838 128.16,60.624 ; U3.98@129.656,60.624 127.3,60.624 cw(c127.3,60.68) v1(127.26,60.64) 128.16,60.624 ; v1(138.56,36.57) 139.595,35.535 ccw(c139.612,35.552) 139.612,35.528 ; 139.6,35.54 139.612,35.528 ; U1.11@158.3,39.919 156.774,39.919 ccw(c156.774,38.556) 155.81,39.52 ccw(c156.703,38.627) 155.44,38.627 155.44,38.211 cw(c152.374,38.211) 154.542,36.043 154.027,35.528 cw(c151.859,37.696) 153.948,35.452 cw(c151.859,37.696) 151.859,34.63 141.78,34.63 cw(c141.78,37.696) 139.612,35.528
  Bottom Layer w0.254: v1(127.26,60.64) ccw(c127.26,59.119) 126.185,60.195 ccw(c126.654,59.725) 125.99,59.725 125.99,57.9 ccw(c129.056,57.9) 126.888,55.732 129.292,53.328 131.712,50.908 cw(c129.544,48.74) 132.61,48.74 132.61,46.85 ccw(c135.676,46.85) 133.508,44.682 ; 133.508,44.682 137.662,40.528 cw(c135.494,38.36) 138.56,38.36 v1(138.56,36.57)
TXD2: U3.65 U7.4 | length 112.8
  Top Layer w0.2: v1@83.31,76.9 91.379,76.9 cw(c91.379,74.749) 92.9,76.27 ccw(c93.842,77.212) 93.842,75.88 114.03,75.88 ccw(c114.03,78.946) 116.198,76.778 117.722,78.302 cw(c119.89,76.134) 119.89,79.2 133.73,79.2 cw(c133.73,76.134) 135.898,78.302 135.948,78.252 cw(c133.78,76.084) 136.846,76.084 U3.65@136.846,73.684 ; v1(83.31,76.92) 84.211,76.9 ; v1@83.328,76.721 84.211,76.9 ; v1@83.337,77.118 84.211,76.9
  Bottom Layer w0.2: U7.4@82.291,30.928 82.291,51.879 ccw(c79.225,51.879) 81.393,54.047 cw(c82.922,55.576) 80.76,55.576 80.76,62.31 ccw(c77.694,62.31) 79.862,64.478 cw(c81.026,65.642) 79.38,65.642 79.38,74.683 cw(c81.497,74.683) 80,76.18 cw(c81.787,74.393) 81.787,76.92 v1(83.31,76.92) ; v1@83.262,76.726 82.62,76.9 v1@83.262,77.114
TXD2-1: U1.10 U3.48 | length 49.8
  Top Layer w0.2: U3.48@145.776,70.624 148.072,70.624 ccw(c148.072,72.148) 149.15,71.07 cw(c149.826,70.394) 149.826,71.35 v1(151.95,71.35) 151.05,71.35 ; v1@151.928,71.151 151.05,71.35 ; v1@151.928,71.549 151.05,71.35 ; U1.10@158.3,38.649 cw(c158.422,38.527) U1.10@158.422,38.7
  Top Layer w0.5: U1.10@158.3,38.649 159.293,38.649 ccw(c159.293,39.465) 159.799,38.825 ccw(c159.293,39.465) v1(159.87,38.888)
  Bottom Layer w0.254: v1(151.95,71.35) 153.46,71.35 cw(c153.46,68.284) 155.628,70.452 157.442,68.638 cw(c155.274,66.47) 158.34,66.47 158.34,43.286 ccw(c161.037,43.286) 159.13,41.378 cw(c157.343,39.592) 159.87,39.592 v1(159.87,38.888) ; v1@151.964,71.178 153.012,71.35 v1@151.964,71.522
TXDM: R520.1 U501.21 | length 4.8
  Top Layer w0.5: R520.1@110.894,34.246 111.744,33.396 ccw(c113.912,35.564) 113.912,32.498 U501.21@115.11,32.498
UD+: D7.3 D7.4 J3.3 R23.1 R31.1 | length 23.4
  Top Layer w0.3: v1(162.88,98.48) 162.88,86.49 ccw(c165.946,86.49) 163.778,84.322 164.971,83.129 cw(c163.195,81.354) R23.1@165.706,81.354 ; R31.1@165.654,79.094 R23.1@165.654,81.176
  Bottom Layer w0.5: J3.3@160.99,101.08 v1(162.88,98.48)
UD-: D7.1 D7.6 J3.2 R22.1 R30.1 | length 23.3
  Top Layer w0.3: J3.2@162.88,101.06 160.94,98.52 cw(c160.916,98.496) 160.95,98.496 160.95,86.41 ccw(c164.016,86.41) 161.848,84.242 162.296,83.794 cw(c160.128,81.626) 163.17,82.009 cw(c160.128,81.626) 163.194,81.626 R22.1@163.194,81.246 ; R30.1@163.254,79.094 R22.1@163.254,81.296
VCCGPS: C504.1 C506.2 C507.1 R509.2 U500.5 U503.23 | length 43.8
  Top Layer w0.3: R509.2@91.71,11.513 91.997,12.095 ; R509.2@91.997,11.446 91.997,12.095 ; v1(92.03,18.47) 92.38,18.47 cw(c92.38,15.404) 94.548,17.572 94.602,17.518 cw(c92.434,15.35) 95.5,15.35 95.5,13.941 cw(c94.339,13.941) 95.16,13.12 cw(c93.808,14.472) 93.808,12.56 92.43,12.56 ccw(c92.43,12.15) 92.14,12.44 ccw(c92.485,12.095) 91.997,12.095 ; R509.2@92.284,11.513 91.997,12.095
  Top Layer w0.8: C506.2@87.778,30.361 cw(c86.782,29.366) 88.19,29.366 U503.23@88.19,26.694 v2(88.19,28.73)
  Bottom Layer w1: v2(88.19,28.73) 89.01,28.77 ; v2@88.19,28.773 89.01,28.77 ; U500.5@92.057,17.294 92.057,25.751 ccw(c89.057,25.751) 91.178,27.872 ccw(c89.01,25.704) 89.01,28.77 ; C507.1@92.057,23.231 C504.1@91.958,19.778 ; C504.1@91.958,19.778 v1(92.03,18.47) 92.057,21.771 C504.1@91.958,19.778
VCCGSM: C500.1 C503.1 C521.1 D503.2 D504.2 pad.5@112.68,3.12 pad.6@118.86,10.11 pad.29 Q500.3 R504.1 U501.32 U501.33 U501.34 U502.6 | length 88.6
  Top Layer w0.5: v1(134.4,14.01) 136.14,14.01 cw(c136.14,10.944) 138.308,13.112 139.912,11.508 ccw(c142.08,13.676) 142.08,10.61 v1(142.8,10.61) ; 153.594,31.294 R504.1@153.594,32.046 ; 153.6,31.28 ccw(c155.483,29.397) 152.82,29.397 152.82,28.516 ccw(c154.186,28.516) 153.22,27.55 ccw(c153.632,27.962) 153.632,27.379 155.756,27.379 ccw(c155.756,29.764) C521.1@157.442,28.078 ; v1(156.71,13) 156.71,23.289 cw(c156.881,23.289) v1(156.76,23.41) pad.29@156.71,21.604 ; 120.67,8.23 v1(122.18,8.23) 120.67,8.23
  Top Layer w0.8: 118.71,10.718 U501.32@118.71,13.598 ; 119.81,10.992 U501.33@119.81,13.598 ; 120.91,10.844 U501.34@120.91,13.598
  Bottom Layer w0.2: 119.69,6.7 cw(c119.603,6.613) 119.726,6.613
  Bottom Layer w0.5: C500.1@119.726,4.392 119.726,6.613 ; 123.708,9.468 v1(122.18,8.23) ; 132.6,14.01 v1(134.4,14.01) 129.52,14.01 ccw(c129.52,10.944) 127.352,13.112 122.675,8.435 ; v1(142.8,10.61) 144.242,12.052 cw(c146.41,9.884) 146.41,12.95 156.589,12.95 ccw(c156.589,13.121) v1(156.71,13) 154.904,12.95 ; v1(156.4,27.49) cw(c155.531,26.621) 156.76,26.621 v1(156.76,23.41) ; v1(122.18,8.23) ccw(c122.18,8.93) 122.675,8.435 ; v1(122.18,8.23) 122.675,8.435
  Bottom Layer w1: D504.2@115.257,4.196 119.251,4.196 ccw(c119.251,4.868) C500.1@119.726,4.392
VIN: D104.2 F100.2 L101.3 pad.2@14.283,32.11 pad.33 | length 29.2
  Top Layer w2: D104.2@17.428,26.902 19.748,26.902 cw(c19.748,23.836) D104.2@21.916,26.004
  Top Layer w3: F100.2@9.906,36.852 14.283,34.008 D104.2@14.283,27.209 ; D104.2@17.428,26.902 21.128,26.902 cw(c21.128,23.836) 23.296,26.004 25.558,23.742 cw(c23.39,21.574) 26.456,21.574 L101.3@26.456,20.848
VIN1: C102.1 C119.1 L101.1 Q104.3 R103.2 R104.2 R108.2 R112.2 R113.2 U103.1 U103.2 U103.3 | length 11.7
  Bottom Layer w0.5: R113.2@20.412,13.396 20.412,24.962 cw(c20.537,24.962) 20.449,25.05
VINC: C103.1 D204.2 J201.4 pad.3@48.34,30.28 Q104.2 R105.2 R212.2 R213.1 R239.1 U101.1 U103.5 U103.6 U103.7 U103.8 U201.8 | length 55.6
  Top Layer w0.5: v1(42.389,36.44) ccw(c42.347,36.481) 42.406,36.481 R213.1@42.406,38.454
  Top Layer w2: 48.37,36.27 ccw(c48.442,36.198) 48.34,36.198 48.34,23.87 ccw(c51.406,23.87) 49.238,21.702 52.429,18.511 cw(c50.261,16.343) 53.327,16.343
  Top Layer w2.5: J201.4@53.327,8.964 53.327,16.343
  Bottom Layer w0.5: C103.1@12.666,29.202 14.494,29.202 ccw(c14.494,29.435) U103.8@14.659,29.27 ; R105.2@32.716,33.53 34.43,33.53 v2@34.47,33.57 ; v2@37.209,32.22 R239.1@38.717,31.495 38.717,29.414 R212.2@38.686,29.414 ; v1(39.919,22.43) cw(c39.479,21.991) 40.101,21.991 U201.8@40.101,20.486 ; 43.802,35.197 cw(c43.961,35.197) 43.849,35.31
  Bottom Layer w2: 36.439,36.24 48.239,36.27 ; 48.219,36.12 ccw(c48.219,36.291) 48.34,36.17 48.34,33.33
  other v1: 48.34,32.9 49.02,33.36 48.34,33.85 47.65,34.3 48.34,34.84 49.04,35.31 48.34,35.83 48.32,36.82
  other v2: 34.279,32.26 35.549,32.26 36.819,32.26 23.879,32.31 24.899,32.96 34.279,33.53 35.549,33.53 36.819,33.53 23.869,33.58 35.549,34.8 36.819,34.8
VINGND: C120.2 D102.2 D104.1 L101.4 | length 28.5
  Top Layer w2: D104.1@21.42,13.39 ccw(c21.52,13.49) D104.1@21.52,13.348
  Top Layer w3: C120.2@2.749,29.05 2.622,21.587 ccw(c5.688,21.587) 2.708,20.867 ccw(c5.688,21.587) 3.52,19.419 4.571,18.368 ccw(c6.739,20.536) 6.739,17.47 D104.1@14.129,17.47 ; D104.1@21.52,13.348 L101.4@26.456,13.348
  Bottom Layer w0.5: 3.17,27.01 3.17,29.247 cw(c3.187,29.247) C120.2@3.175,29.259
VLIBAT: BQ100.1 D101.1 U102.3 | length 10.5
  Top Layer w1: BQ100.1@15.311,44.321 15.311,44.621 cw(c16.879,44.621) 15.77,45.73 cw(c17.025,44.475) 17.025,46.25 17.293,46.25 ccw(c17.293,47.377) 18.09,46.58 ccw(c16.264,48.406) 18.846,48.406 D101.1@18.846,50.545 ; U102.3@16.33,51.55 D101.1@18.59,51.55
VUSB: C32.1 D7.5 F2.2 J3.1 | length 38.2
  Top Layer w0.3: D7.5@161.896,97.494 cw(c164.702,97.494) 162.718,99.478 164.906,101.666 cw(c165.35,101.222) J3.1@165.35,101.85 ; J3.1@165.064,101.304 ccw(c164.258,102.11) J3.1@165.398,102.11
  Top Layer w0.5: J3.1@165.352,101.552 cw(c165.54,101.364) J3.1@165.54,101.63
  Top Layer w1.5: C32.1@152.51,98.8 cw(c152.534,98.824) 152.5,98.824 152.5,106.81 cw(c155.566,106.81) 153.398,108.978 154.032,109.612 cw(c156.2,107.444) 156.2,110.51 163.234,110.51 cw(c163.234,107.574) 165.31,109.65 cw(c163.886,108.226) 165.697,109.106 cw(c163.886,108.226) 165.9,108.226 165.9,102.499 cw(c164.671,102.499) J3.1@165.54,101.63
WP: R33.1 U2.3 U4.3 | length 22.5
  Top Layer w0.2: U2.3@141.721,86.14 141.721,86.759 cw(c142.811,86.759) 142.04,87.53 ccw(c141.243,88.327) 142.37,88.327 142.37,92.7 ccw(c140.97,92.7) 141.96,93.69 cw(c142.438,94.168) 141.762,94.168 U4.3@141.762,95.814
  Top Layer w0.3: v1(143.54,82.11) 144.178,82.11 ccw(c144.178,83.442) 145.12,82.5 ccw(c143.985,83.635) 145.59,83.635 145.59,86.213 cw(c146.887,86.213) 145.97,87.13 146.005,87.165 cw(c146.726,86.444) R33.1@146.726,87.464
  Top Layer w0.5: v1(141.36,84.32) ccw(c140.489,85.191) 141.721,85.191 U2.3@141.721,86.14
  Bottom Layer w0.3: v1(141.36,84.32) ccw(c141.432,84.32) 141.381,84.269 v1(143.54,82.11)
  Bottom Layer w0.5: v1@143.519,82.161 cw(c143.468,82.11) v1(143.54,82.11)
pads on no net: D2.5 D11.5 D500.5 D502.3 J3. J400.29 J400.30 J501.2 J501.4 J501.5 J503.0 L101.5 U3.14 U5.0 U5.1 U5.8 U8.4 U8.5 U8.7 U9.3 U9.9 U9.13 U102.1 U103.0 U200.5 U201.5 U201.6 U201.7 U400.8 U501.11 U501.14 U501.15 U501.16 U501.17 U501.18 U501.19 U501.25 U501.41 U501.42 U503.1 U503.2 U503.3 U503.4 U503.5 U503.6 U503.15 U503.16 U503.17 U503.18 U503.19 U504.2 U504.4 U504.5 X1.3 X1.4

## Polygon pours and split planes (outlines as drawn)
GND on Top Layer "Top Layer-GND" (hatched 90Degree grid 0.25 track 0.52, remove dead copper, pour order 1000): 169.42,0.59 169.42,99.22 166.55,99.22 166.55,111.83 77.6,111.83 77.6,83.48 0.9,83.48 0.9,48.57 76.06,48.57 76.06,0.54 169.42,0.54
AGND on Top Layer "Top Layer-AGND" (hatched 90Degree grid 0.25 track 0.52, remove dead copper, pour order 1001): 74.5,0.47 0.8,0.47 0.8,47.21 74.28,47.21 74.28,0.47
GND on Bottom Layer "Bottom Layer-GND" (hatched 90Degree grid 0.25 track 0.52, remove dead copper, pour order 1002): 169.43,0.55 76.04,0.55 76.04,48.3 0.75,48.3 0.75,83.92 77.5,83.92 77.5,111.8 166.57,111.8 166.57,99.05 169.3,99.05 169.3,0.57
AGND on Bottom Layer "Bottom Layer-AGND" (hatched 90Degree grid 0.25 track 0.52, remove dead copper, pour order 1003): 74.67,0.74 0.85,0.74 0.85,47.23 74.41,47.23 74.41,0.76

## Keep-outs
Keep-Out Layer:
  lines w0.1: 0,-1.05 170.4,-1.05 170.4,113.1 76.15,113.1 76.15,84.55 0,84.55 0,0 0,-1.05